# Altium PCB FiltrosGyrator_PCB.PcbDoc
Units mm, origin at the board's own origin, x right, y up, seen from the top; angles counter-clockwise.
Board outline 44.89 x 46.49 mm, 2 copper layers (Top Layer, Bottom Layer); 37 components, 19 nets, 83 pads, 0 vias.
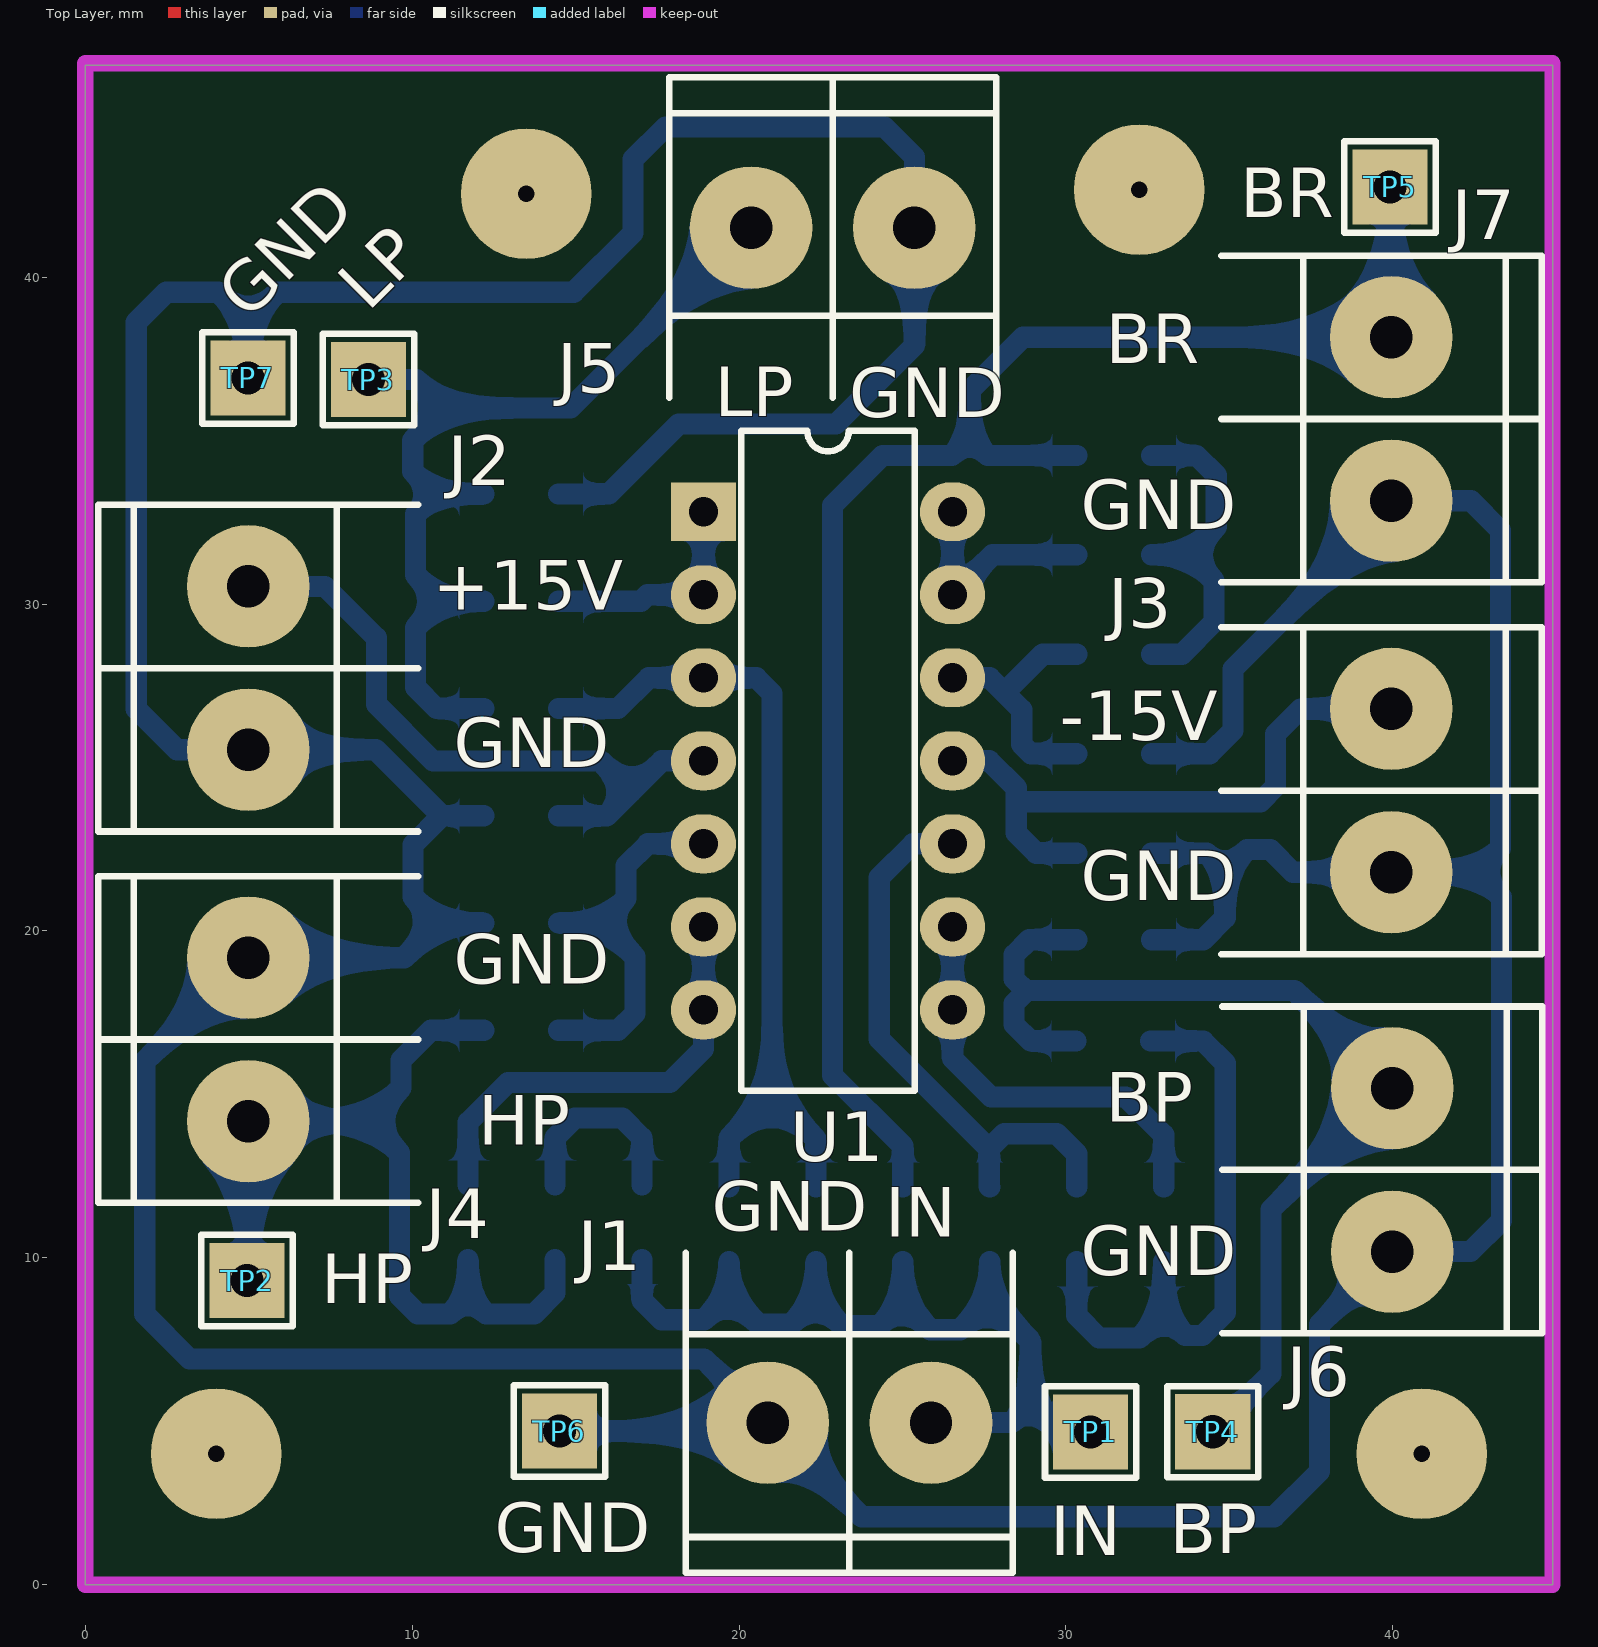
[diagram p0: Top Layer view]
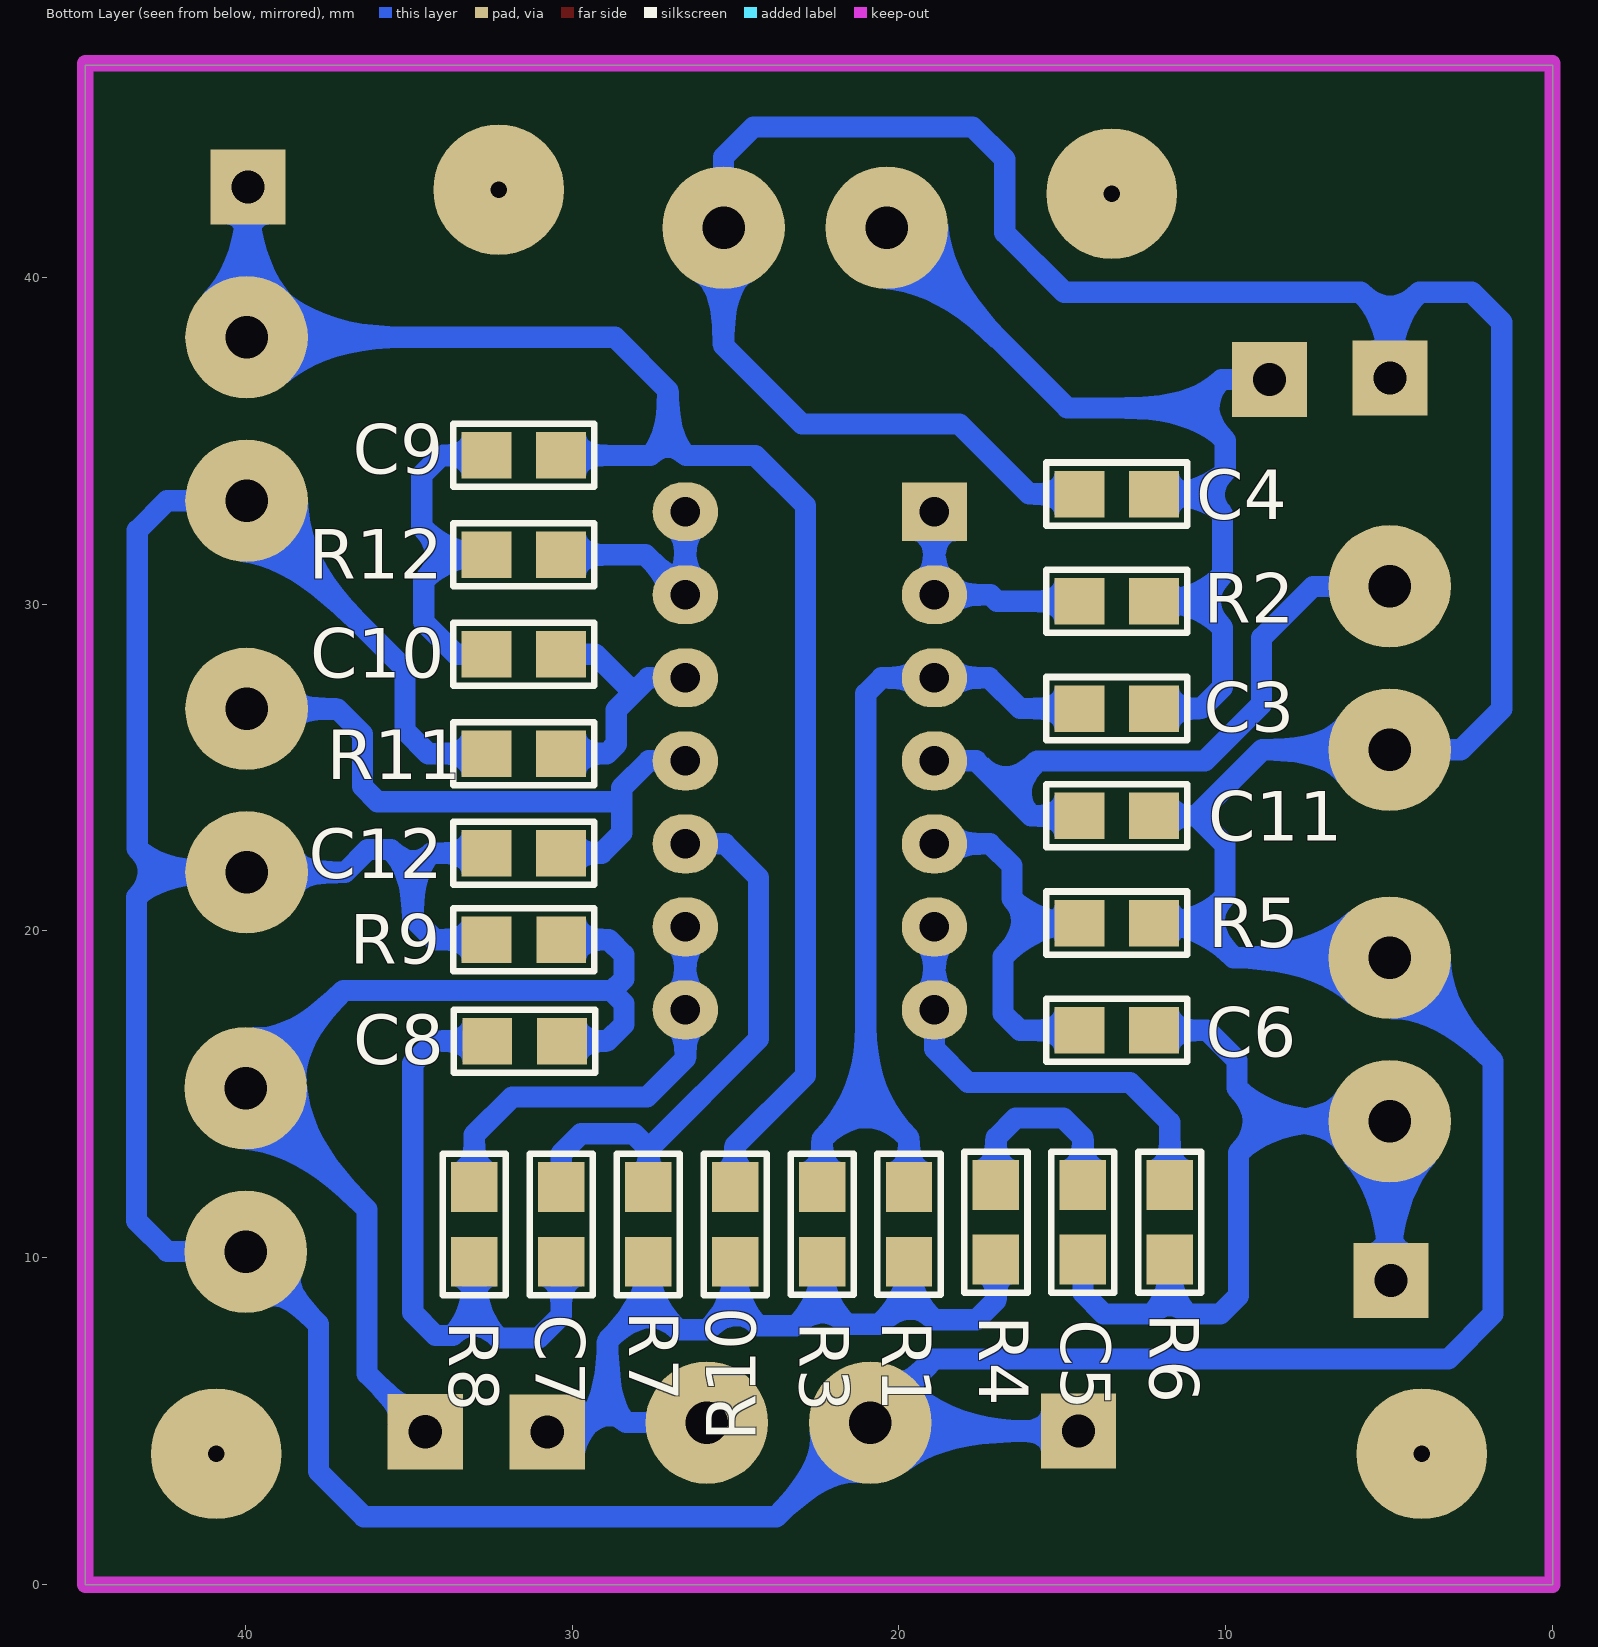
[diagram p1: Bottom Layer view, seen from below]
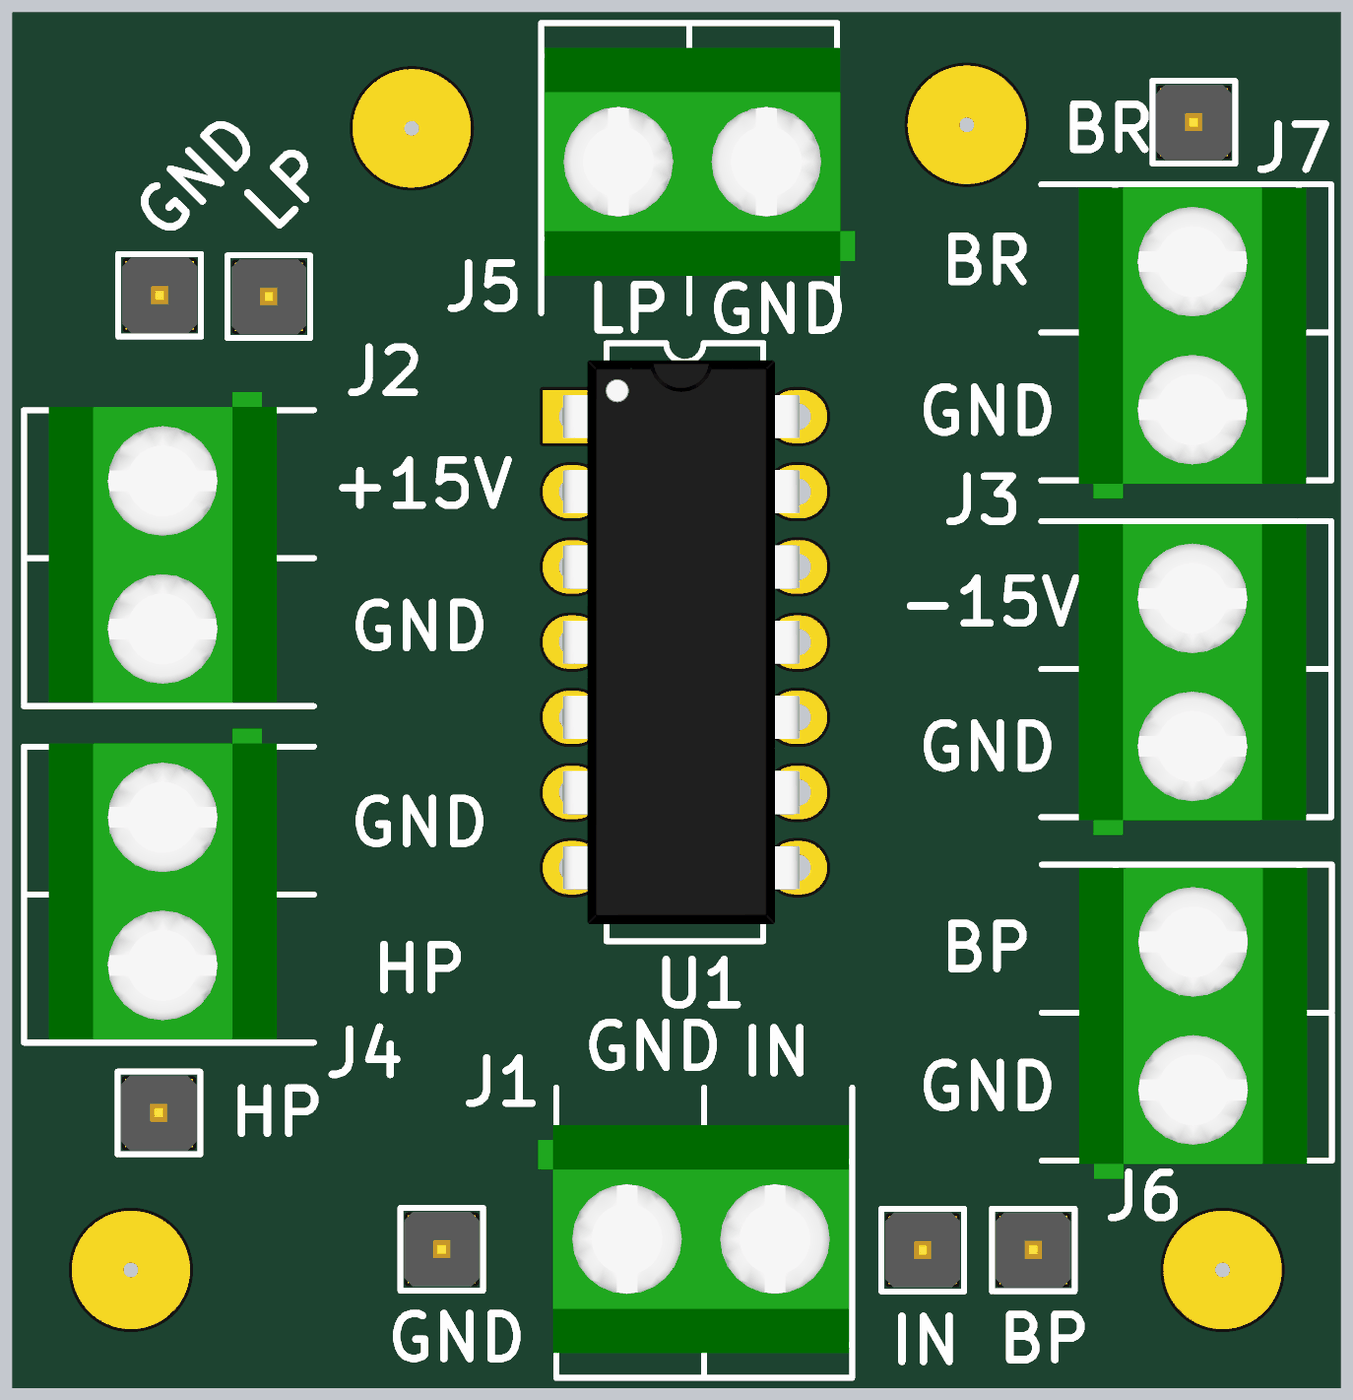
[diagram p2: 3D render of the assembled board from above, using the file's embedded part models]
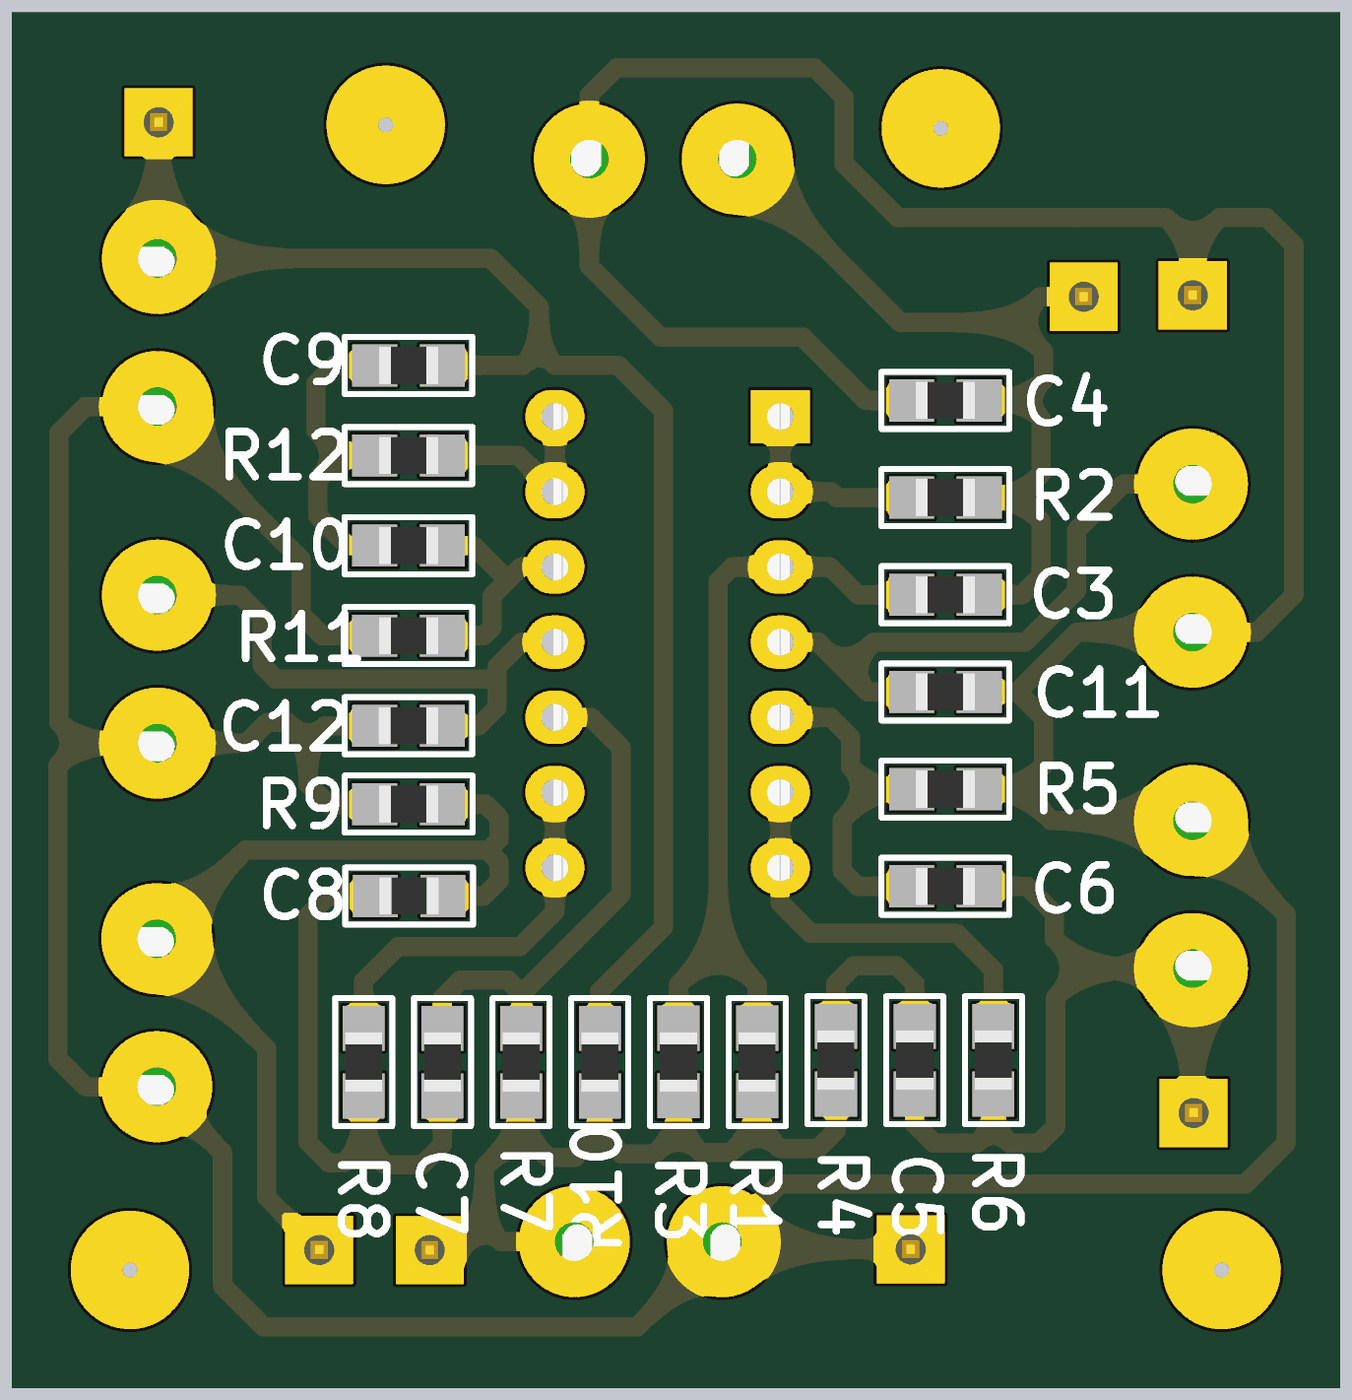
[diagram p3: 3D render of the assembled board from below, using the file's embedded part models]

## Layer stack, top to bottom
Top Solder: solder mask 0.0102, Solder Resist, Dk 3.5
Top Layer: signal copper 0.0356
Dielectric 1: dielectric 0.32, FR-4, Dk 4.8
Bottom Layer: signal copper 0.0356
Bottom Solder: solder mask 0.0102, Solder Resist, Dk 3.5

## Board outline
0,0 44.893,0 44.893,46.488 0,46.488

## Design rules (kind name [scope] priority, off if disabled: settings)
Clearance [All] p1: gap=0.35
PolygonConnect [All] p1: connectstyle=Relief reliefconductorwidth=0.254 reliefentries=4 polygonreliefangle="90 Angle" airgapwidth=0.254
RoutingVias [All] p1: holewidth=0.711 width=1.27 viastyle="Through Hole" minholewidth=0.711 minwidth=1.27 maxholewidth=0.711 maxwidth=1.27
SolderMaskExpansion [All] p1: expansion=0.102
Width [All] p1: maxlimit=0.7 minlimit=0.55 preferedwidth=0.65
30 further rules are at their usual default settings.

## Components (designator, comment, footprint, x,y, rotation, side; value= is the part's Value field where it differs from the comment)
C3 "470pF" 0805 13.335,26.806 r180 bottom
C4 "33nF" 0805 13.335,33.37 r180 bottom
C5 "33nF" 0805 14.371,11.086 r270 bottom
C6 "2.7nF" 0805 13.335,16.961 r0 bottom
C7 "6.8nF" 0805 30.334,11.02 r270 bottom
C8 "2.2nF" 0805 31.457,16.63 r180 bottom
C9 "100nF" 0805 31.48,34.554 r0 bottom
C10 "8.2nF" 0805 31.48,28.468 r0 bottom
C11 "100nF" 0805 13.335,23.525 r180 bottom
C12 "100nF" 0805 31.48,22.382 r180 bottom
J1 "Input" BORNERA2 23.375,4.957 r90 top
J2 "15V" BORNERA2 4.986,28.044 r0 top
J3 "15V" BORNERA2 39.964,24.294 r180 top
J4 "HP_Output" BORNERA2 4.986,16.68 r0 top
J5 "LP_Output" BORNERA2 22.867,41.522 r270 top
J6 "BP_Output" BORNERA2 39.986,12.689 r180 top
J7 "BR_Output" BORNERA2 39.964,35.666 r180 top
R1 "56k 1%" 0805 19.692,11.023 r90 bottom
R2 "1k5 1%" 0805 13.335,30.089 r180 bottom
R3 "56k 1%" 0805 22.352,11.023 r90 bottom
R4 "5k6 1%" 0805 17.031,11.086 r90 bottom
R5 "820k 1%" 0805 13.335,20.243 r0 bottom
R6 "120 1%" 0805 11.71,11.086 r90 bottom
R7 "100k 1%" 0805 27.673,11.02 r90 bottom
R8 "470 1%" 0805 32.994,11.02 r270 bottom
R9 "10k 1%" 0805 31.476,19.734 r180 bottom
R10 "1k 1%" 0805 25.013,11.02 r90 bottom
R11 "300k 1%" 0805 31.48,25.425 r0 bottom
R12 "100 1%" 0805 31.48,31.511 r0 bottom
TP1 "IN" TPTH 30.76,4.671 r0 top
TP2 "HP" TPTH 4.946,9.301 r0 top
TP3 "LP" TPTH 8.659,36.873 r0 top
TP4 "BP" TPTH 34.496,4.675 r0 top
TP5 "BR" TPTH 39.923,42.767 r0 top
TP6 "GND" TPTH 14.507,4.697 r0 top
TP7 "GND" TPTH 4.974,36.922 r0 top
U1 "TL084" J014 22.724,25.206 r270 top

## Footprints (in the part's own frame and the unit in brackets; to place one, negate y for a bottom-side part, rotate by r counter-clockwise, add the part's x,y. Pads: shape width x height; smd on the part's side, far side on the other; paste and mask are expansions set on the pad)
0805 [mil] "Pasivo 0805"
  rect 60x56 smd: 1(-45,0) 2(45,0)
  silkscreen extent -85,-38 85,38, body extent -40,-25 39,25, height 15
BORNERA2 [mm] "Bornera con Tornillos 5mm separación"
  round 3.75 hole 1.3: 1(0,2.5) 2(0,-2.5)
  silkscreen extent -4.6,-5 5.2,5, body extent -3.76,-4.89 3.94,5.61, height 10
J014 [mm] "DIP; 14 Leads; Row Spacing 7.62 mm; Pitch 2.54 mm"
  rect 1.8x2 hole 0.9: 1(-7.62,-3.81)
  oval 1.8x2 hole 0.9: 2(-5.08,-3.81) 3(-2.54,-3.81) 4(0,-3.81) 5(2.54,-3.81) 6(5.08,-3.81) 7(7.62,-3.81) 8(7.62,3.81) 9(5.08,3.81) 10(2.54,3.81) 11(0,3.81) 12(-2.54,3.81) 13(-5.08,3.81) 14(-7.62,3.81)
  silkscreen extent -10.1,-2.65 10.1,2.65, body extent -9.52,-4.13 9.53,3.87, height 4.01
TPTH [mm]
  rect 2.3x2.3 hole 1.016: 1(0,0)
  silkscreen extent -1.4,-1.4 1.4,1.4, body extent -1.27,-1.27 1.27,1.27, height 6.04

## Part data
C3 C4 C5 C6 C7 C8 C9 C10 C11 C12: library part CAP
J1 J4 J5 J6 J7: library part "BORNERA 2"
J2 J3: library part BATERIA, "BATERIA"
R1 R2 R3 R4 R5 R6 R7 R8 R9 R10 R11 R12: library part RES
TP1 TP2 TP3 TP4 TP5 TP6 TP7: library part TP
U1: library part TL084J, "JFET-Input Operational Amplifier"

## Free pads (board coordinates)
  round 4 hole 0.5: 2(4,4) 2(13.491,42.562) 2(32.249,42.68) 2(40.893,4)

## Nets (pads, with @x,y where several pads share a name; then routed paths per layer and width w, separated by ;. In a path a pad name is that pad's centre, name@x,y a point inside that pad or via, vN(x,y) a via of type N, cw(c..) or ccw(c..) an arc to the next point about the centre after c; other vN are vias at no path point)
BP_OUTPUT: C8.2 J6.2 R9.2 TP4.1 | length 31.9
  Bottom Layer w0.65: C8.2 28.926,16.63 28.416,17.14 28.416,17.785 28.79,18.159 ; R9.2 28.881,19.734 28.416,19.27 28.416,18.533 28.79,18.159 ; TP4.1 36.276,6.454 36.276,11.479 J6.2 36.993,18.182 28.814,18.182 28.79,18.159
BR_OUTPUT: C9.1 J7.2 R10.2 TP5.1 | length 49.9
  Bottom Layer w0.65: R10.2 25.013,13.426 22.86,15.578 22.86,33.019 24.395,34.554 26.516,34.554 27.063,35.101 ; C9.1 27.61,34.554 27.063,35.101 ; TP5.1 39.923,38.207 J7.2 28.691,38.166 27.063,36.538 27.063,35.101
GND: C4.1 C11.2 C12.1 J1.1 J2.2 J3.1 J4.1 J5.1 J6.1 J7.1 R5.1 R9.1 R11.2 TP6.1 TP7.1 | length 205.6
  Bottom Layer w0.65: TP7.1 4.974,38.646 ; R5.1 10.822,20.243 ; C11.2 10.904,23.525 ; C4.1 16.012,33.37 18.156,35.514 22.967,35.514 25.367,37.914 J5.1 25.367,43.686 24.452,44.601 17.748,44.601 16.759,43.613 16.759,41.363 14.94,39.544 5.872,39.544 4.974,38.646 ; TP6.1 20.615,4.697 J1.1 ; R9.1 34.206,19.734 34.876,20.404 34.876,21.822 ; C12.1 34.316,22.382 34.876,21.822 ; R11.2 34.401,25.425 35.115,26.138 35.115,28.016 39.964,32.865 J7.1 42.397,33.166 43.304,32.26 43.304,22.524 42.574,21.794 ; 4.974,38.646 4.076,39.544 2.471,39.544 1.556,38.628 1.556,26.794 2.806,25.544 J2.2 8.885,25.544 10.904,23.525 ; 10.822,20.243 9.759,19.18 J4.1 1.818,16.012 1.818,8.276 3.188,6.906 18.925,6.906 J1.1 ; 10.822,20.243 10.021,21.044 10.021,22.641 10.904,23.525 ; J1.1 23.752,2.079 36.378,2.079 37.764,3.464 37.764,7.967 J6.1 42.386,10.189 43.329,11.132 43.329,21.039 42.574,21.794 ; 34.876,21.822 35.545,22.491 36.254,22.491 36.952,21.794 J3.1 42.574,21.794
HP_OUTPUT: C5.2 C6.1 J4.2 R6.1 TP2.1 | length 27.3
  Bottom Layer w0.65: TP2.1 4.986,9.341 J4.2 8.641,14.18 ; R6.1 11.71,8.83 ; C6.1 10.573,16.961 9.658,16.046 9.658,15.197 8.641,14.18 ; C5.2 14.371,8.919 13.734,8.282 12.259,8.282 11.71,8.83 ; 8.641,14.18 9.609,13.211 9.609,8.839 10.167,8.282 11.162,8.282 11.71,8.83
INPUT: J1.2 R1.1 R3.1 R4.1 R7.1 R10.1 TP1.1 | length 28.2
  Bottom Layer w0.65: R4.1 17.031,8.702 17.628,8.105 18.934,8.105 19.692,8.862 ; R1.1 19.692,8.862 ; R3.1 22.352,8.725 ; R10.1 25.013,8.639 ; J1.2 28.35,4.957 28.921,5.527 ; R7.1 27.673,8.705 ; TP1.1 29.778,4.671 28.921,5.527 ; 19.692,8.862 20.585,7.969 21.596,7.969 22.352,8.725 ; 22.352,8.725 23.159,7.918 24.292,7.918 25.013,8.639 ; 25.013,8.639 25.852,7.799 26.768,7.799 27.673,8.705 ; 27.673,8.705 28.921,7.457 28.921,5.527
LP_OUTPUT: C3.2 C4.2 J5.2 R2.2 TP3.1 | length 29.7
  Bottom Layer w0.65: TP3.1 10.129,36.873 11.001,36 ; C3.2 10.748,26.806 10.097,27.457 10.097,29.282 10.904,30.089 ; R2.2 10.904,30.089 ; C4.2 10.707,33.37 ; J5.2 14.846,36 11.001,36 ; 10.707,33.37 10.014,34.064 10.014,35.013 11.001,36 ; 10.707,33.37 10.097,32.76 10.097,30.895 10.904,30.089
NetC3_1: C3.1 R1.2 R3.2 U1.3 | length 26.1
  Bottom Layer w0.65: C3.1 16.296,26.806 17.236,27.746 U1.3 20.536,27.746 21.012,27.27 21.012,14.978 ; R1.2 19.692,13.658 21.012,14.978 ; R3.2 22.352,13.638 21.012,14.978
NetC5_1: C5.1 R4.2 | length 6
  Bottom Layer w0.65: C5.1 14.371,13.674 14.971,14.275 16.427,14.275 17.031,13.67 R4.2
NetC6_2: C6.2 R5.2 U1.5 | length 11.8
  Bottom Layer w0.65: C6.2 16.298,16.961 16.815,17.477 16.815,19.218 15.79,20.243 ; R5.2 15.79,20.243 ; U1.5 17.21,22.666 16.543,21.999 16.543,20.995 15.79,20.243
NetC7_1: C7.1 R7.2 U1.10 | length 17.7
  Bottom Layer w0.65: U1.10 25.324,22.666 24.293,21.636 24.293,16.697 27.655,13.335 ; R7.2 27.655,12.181 27.655,13.335 ; C7.1 30.334,13.185 29.725,13.794 28.113,13.794 27.655,13.335
NetC7_2: C7.2 C8.1 R8.2 | length 19.1
  Bottom Layer w0.65: C7.2 30.334,8.234 31.021,7.547 32.257,7.547 32.994,8.284 ; C8.1 34.203,16.63 34.878,15.954 34.878,8.325 34.178,7.626 33.652,7.626 32.994,8.284 ; R8.2 32.994,8.284
NetC9_2: C9.2 C10.2 R12.2 | length 10.9
  Bottom Layer w0.65: C10.2 33.554,28.468 34.538,29.452 34.538,30.72 33.747,31.511 ; R12.2 33.747,31.511 ; C9.2 33.998,34.554 34.604,33.948 34.604,32.367 33.747,31.511
NetC10_1: C10.1 R11.1 U1.12 | length 8.1
  Bottom Layer w0.65: U1.12 27.67,27.746 28.066,27.35 ; R11.1 28.938,25.425 28.649,25.713 28.649,26.768 28.066,27.35 ; C10.1 29.295,28.468 28.177,27.35 28.066,27.35
NetR2_1: R2.1 U1.1 U1.2 | length 7.1
  Bottom Layer w0.65: R2.1 17.002,30.088 17.2,30.286 U1.2 U1.1
NetR6_2: R6.2 U1.6 U1.7 | length 13.8
  Bottom Layer w0.65: R6.2 11.71,14.144 12.933,15.366 17.883,15.366 18.914,16.397 U1.7 U1.6
NetR8_1: R8.1 U1.8 U1.9 | length 13.1
  Bottom Layer w0.65: U1.9 U1.8 26.534,16.098 27.709,14.923 31.835,14.923 32.994,13.763 R8.1
NetR12_1: R12.1 U1.13 U1.14 | length 6.9
  Bottom Layer w0.65: U1.14 U1.13 27.758,31.511 R12.1
VCC: C11.1 J2.1 U1.4 | length 20.6
  Bottom Layer w0.65: J2.1 7.332,30.544 8.906,28.97 8.906,26.937 10.64,25.203 15.766,25.203 16.7,24.269 ; C11.1 15.956,23.525 16.7,24.269 ; U1.4 17.638,25.206 16.7,24.269
VEE: C12.2 J3.2 U1.11 | length 19.4
  Bottom Layer w0.65: U1.11 27.658,25.206 28.482,24.382 28.482,23.957 ; C12.2 29.096,22.382 28.482,22.995 28.482,23.957 ; J3.2 37.183,26.794 36.418,26.03 36.418,24.421 35.954,23.957 28.482,23.957

## Keep-outs
Keep-Out Layer:
  lines w0.5: 0,0 0,46.548 44.893,46.548 44.893,0 0,0

## Silkscreen, mask and mechanical layers (free items; w line width, h text height)
Top Overlay:
  text "BR" at 31.216,37.377 h1.52
  text "LP" at 19.261,35.745 h1.52
  text "GND" at 23.373,35.728 h1.52
  text "GND" at 30.454,32.286 h1.52
  text "+15V" at 10.629,29.825 h1.52
  text "-15V" at 29.819,25.838 h1.52
  text "GND" at 11.264,25.01 h1.52
  text "GND" at 30.454,20.945 h1.52
  text "GND" at 11.264,18.393 h1.52
  text "BP" at 31.216,14.167 h1.52
  text "HP" at 12.026,13.456 h1.52
  text "GND" at 19.159,10.831 h1.52
  text "IN" at 24.479,10.647 h1.52
  text "GND" at 30.454,9.469 h1.52